# EAGLE board main V.1 (EAGLE 9.1.3)
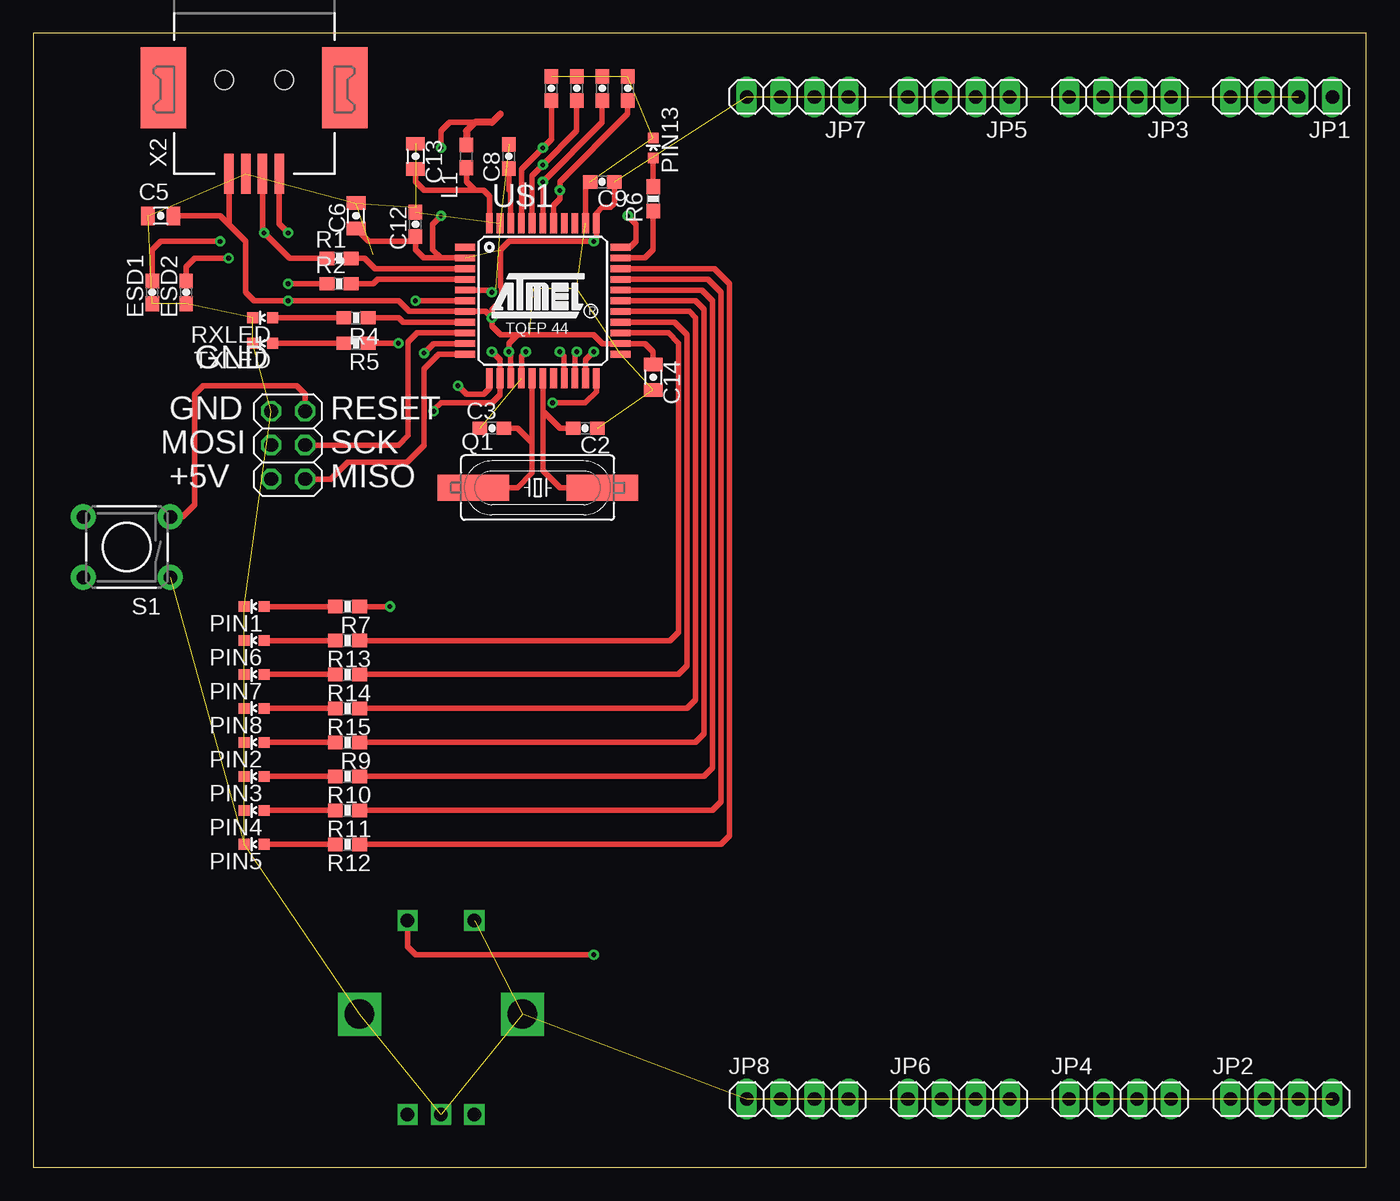
[diagram p0: board, top side]
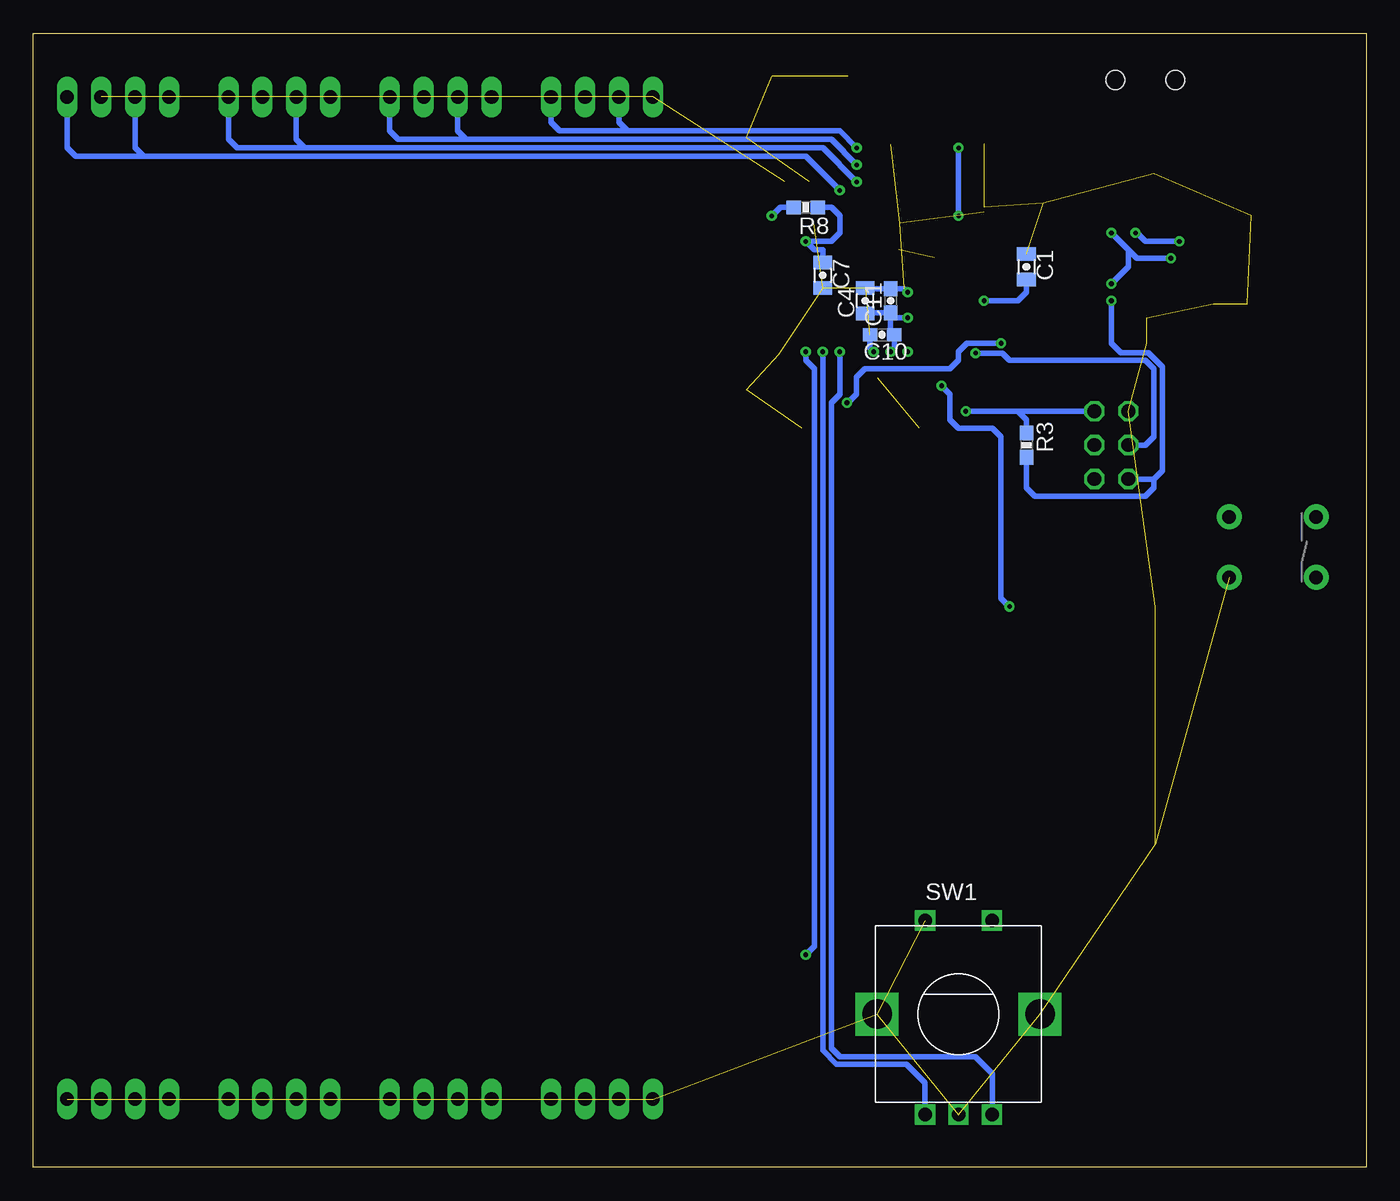
[diagram p1: board, bottom side, seen from below]

Size 99.67 x 84.76 mm. Coordinates in mm from the lower left corner, seen from the top.
Outline: 0,0 99.67,0 99.67,84.76 0,84.76 0,0
Copper layers (1*16): Top 0.035mm / dielectric 1.5mm / Bottom 0.035mm
Design rules "default": minimum track width 6mil, minimum drill 0.35mm, track to track 6mil, track to pad 6mil, pad to pad 6mil, via to via 6mil, smd to smd 6mil, copper to edge 40mil, drill to drill 6mil, minimum pad ring 10mil, minimum via ring 8mil, stop-mask expansion 4mil, vias tented up to drill 0mil, thermal gap 10mil

## Footprints (pad centres in the part's own frame; a part is rotated, then mirrored left to right if it is on the bottom)
CAP-0805 = smd 1 x 1.4: 1 -0.95,0; 2 0.95,0
CAP-0603 = smd 1.1 x 1: 1 -0.9,0; 2 0.9,0
FB-0603 = smd 1.1 x 1: 1 -0.85,0; 2 0.85,0
1X04 = drill 1.016 long: 1 -3.81,0; 2 -1.27,0; 3 1.27,0; 4 3.81,0
2X03 = drill 1.016 octagon: 1 -2.54,-1.27; 2 -2.54,1.27; 3 0,-1.27; 4 0,1.27; 5 2.54,-1.27; 6 2.54,1.27
IND-0603 = smd 1.1 x 1: 1 -0.85,0; 2 0.85,0
LED-0603 = smd 0.8 x 0.8: A 0,-0.75; C 0,0.75
HC49UP = smd 5.334 x 1.93: 1 -4.826,0; 2 4.826,0
RES-0603 = smd 1.1 x 1: 1 -0.9,0; 2 0.9,0
SW-SPST-TH06X06 = drill 1.016 pad 1.88: A@1 -3.251,-2.261; A@2 3.251,-2.261; B@1 -3.251,2.261; B@2 3.251,2.261
ALPS_EC12E_SW = drill 1 square: A -2.5,-7.5; B 2.5,-7.5; C 0,-7.5; D -2.5,7; E 2.5,7 | drill 2.2 square: GND1 -6.1,0; GND2 6.1,0
TQFP44 = smd 1.5 x 0.5: 1 -5.8,4; 2 -5.8,3.2; 3 -5.8,2.4; 4 -5.8,1.6; 5 -5.8,0.8; 6 -5.8,0; 7 -5.8,-0.8; 8 -5.8,-1.6; 9 -5.8,-2.4; 10 -5.8,-3.2; 11 -5.8,-4; 23 5.8,-4; 24 5.8,-3.2; 25 5.8,-2.4; 26 5.8,-1.6; 27 5.8,-0.8; 28 5.8,0; 29 5.8,0.8; 30 5.8,1.6; 31 5.8,2.4; 32 5.8,3.2; 33 5.8,4 | smd 0.5 x 1.5: 12 -4,-5.8; 13 -3.2,-5.8; 14 -2.4,-5.8; 15 -1.6,-5.8; 16 -0.8,-5.8; 17 0,-5.8; 18 0.8,-5.8; 19 1.6,-5.8; 20 2.4,-5.8; 21 3.2,-5.8; 22 4,-5.8; 34 4,5.8; 35 3.2,5.8; 36 2.4,5.8; 37 1.6,5.8; 38 0.8,5.8; 39 0,5.8; 40 -0.8,5.8; 41 -1.6,5.8; 42 -2.4,5.8; 43 -3.2,5.8; 44 -4,5.8
USB-B-SMT = smd 6.04 x 3.4: 5 0.58,6.8; 6 0.58,-6.8 | smd 3 x 0.7: D+ 7,1.875; D- 7,0.625; GND 7,-0.625; VUSB 7,-1.875 | hole 1.4: 0,2.25; 0,-2.25

## Placement (x,y rotation side)
C1  1uF  [CAP-0805]  25.4,67.31 270 bottom
C2  22pF  [CAP-0603]  41.27,55.24 180 top
C3  22pF  [CAP-0603]  34.29,55.24 0 top
C4  1uF  [CAP-0805]  37.47,64.77 90 bottom
C5  [CAP-0805]  9.53,71.12 180 top
C6  [CAP-0805]  24.13,71.12 90 top
C7  [CAP-0805]  40.64,66.68 270 bottom
C8  470nF  [CAP-0603]  35.56,75.57 90 top
C9  470pF  [CAP-0603]  42.55,73.66 180 top
C10  470pF  [CAP-0603]  36.2,62.23 180 bottom
C11  470pF  [CAP-0603]  35.56,64.77 90 bottom
C12  470pF  [CAP-0603]  28.57,70.48 90 top
C13  [CAP-0805]  28.57,75.57 270 top
C14  1uF  [CAP-0805]  46.35,59.05 270 top
C15  [CAP-0603]  38.73,80.65 90 top
C16  [CAP-0603]  40.64,80.65 90 top
C17  [CAP-0603]  42.55,80.65 90 top
C18  [CAP-0603]  44.45,80.65 90 top
ESD1  [FB-0603]  8.89,65.41 90 top
ESD2  [FB-0603]  11.43,65.41 90 top
JP1  [1X04]  93.34,80.01 180 top
JP2  [1X04]  93.34,5.08 0 top
JP3  [1X04]  81.28,80.01 180 top
JP4  [1X04]  81.28,5.08 0 top
JP5  [1X04]  69.22,80.01 180 top
JP6  [1X04]  69.22,5.08 0 top
JP7  [1X04]  57.15,80.01 180 top
JP8  [1X04]  57.15,5.08 0 top
JP9  [2X03]  19.05,53.98 90 top
L1  [IND-0603]  32.38,75.57 90 top
PIN1  [LED-0603]  16.51,41.91 90 top
PIN2  [LED-0603]  16.51,31.75 90 top
PIN3  [LED-0603]  16.51,29.21 90 top
PIN4  [LED-0603]  16.51,26.67 90 top
PIN5  [LED-0603]  16.51,24.13 90 top
PIN6  [LED-0603]  16.51,39.37 90 top
PIN7  [LED-0603]  16.51,36.83 90 top
PIN8  [LED-0603]  16.51,34.29 90 top
PIN13  [LED-0603]  46.35,76.2 0 top
Q1  [HC49UP]  37.72,50.8 0 top
R1  [RES-0603]  22.86,67.95 0 top
R2  [RES-0603]  22.86,66.04 0 top
R3  22k  [RES-0603]  25.4,53.98 270 bottom
R4  [RES-0603]  24.13,63.5 180 top
R5  [RES-0603]  24.13,61.59 180 top
R6  [RES-0603]  46.35,72.39 90 top
R7  [RES-0603]  23.5,41.91 180 top
R8  22k  [RES-0603]  41.91,71.76 180 bottom
R9  [RES-0603]  23.5,31.75 180 top
R10  [RES-0603]  23.5,29.21 180 top
R11  [RES-0603]  23.5,26.67 180 top
R12  [RES-0603]  23.5,24.13 180 top
R13  [RES-0603]  23.5,39.37 180 top
R14  [RES-0603]  23.5,36.83 180 top
R15  [RES-0603]  23.5,34.29 180 top
RXLED  [LED-0603]  17.14,63.5 90 top
S1  SW-SPSTTH06X06  [SW-SPST-TH06X06]  6.99,46.35 180 top
SW1  EC12E_SW  [ALPS_EC12E_SW]  30.48,11.43 0 bottom
TXLED  [LED-0603]  17.14,61.59 90 top
U$1  ATMEGA32U4-AU  [TQFP44]  38.1,64.77 0 top
X2  USB-B-S  [USB-B-SMT]  16.51,81.28 270 top

## Library data of the parts
C1-C18 ESD1 ESD2 L1 R1-R15 = Ai_Passives
JP1-JP9 = pinhead
PIN1-PIN8 PIN13 RXLED TXLED = Ai_LED
Q1 = Ai_FrequencyControl
S1 = Ai_Electromechanical
SW1 = switch-alps; MPN: EC12E2424407; OC_FARNELL: 1520813; OC_NEWARK: 74M1068
U$1 = mega32U4
X2 = usb

## Nets
+5V: C4.1 C5.1 C6.1 C7.1 C9.1 C10.1 C11.1 C12.1 C14.1 JP1.2 JP1.4 JP3.2 JP3.4 JP5.2 JP5.4 JP7.2 JP7.4 JP9.2 L1.2 R3.2 R8.1 U$1.2 U$1.7 U$1.14 U$1.24 U$1.34 X2.VUSB
FADER1: C18.1 JP1.1 JP1.3 U$1.38
FADER2: C17.1 JP3.1 JP3.3 U$1.39
FADER3: C16.1 JP5.1 JP5.3 U$1.40
FADER4: C15.1 JP7.1 JP7.3 U$1.41
GND: C1.1 C2.1 C3.1 C4.2 C5.2 C6.2 C7.2 C8.2 C9.2 C10.2 C11.2 C12.2 C13.1 C14.2 C15.2 C16.2 C17.2 C18.2 ESD1.1 ESD2.1 JP2.1 JP2.2 JP2.3 JP2.4 JP4.1 JP4.2 JP4.3 JP4.4 JP6.1 JP6.2 JP6.3 JP6.4 JP8.1 JP8.2 JP8.3 JP8.4 JP9.6 PIN1.C PIN2.C PIN3.C PIN4.C PIN5.C PIN6.C PIN7.C PIN8.C PIN13.C RXLED.C S1.B@1 SW1.C SW1.D SW1.GND1 SW1.GND2 TXLED.C U$1.5 U$1.15 U$1.23 U$1.35 U$1.43 X2.GND
MISO: JP9.1 U$1.11
MOSI: JP9.4 U$1.10
N$1: ESD1.2 R1.1 X2.D-
N$2: ESD2.2 R2.1 X2.D+
N$3: R1.2 U$1.3
N$4: R2.2 U$1.4
N$5: R8.2 U$1.33
N$6: C1.2 U$1.6
N$7: C2.2 Q1.2 U$1.17
N$8: C3.2 Q1.1 U$1.16
N$9: R7.1 U$1.12
N$10: R4.1 U$1.8
N$11: R4.2 RXLED.A
N$12: R5.1 U$1.22
N$13: R5.2 TXLED.A
N$14: R6.1 U$1.32
N$15: PIN13.A R6.2
N$16: C8.1 U$1.42
N$17: PIN1.A R7.2
N$18: PIN2.A R9.2
N$19: SW1.E U$1.21
N$20: SW1.A U$1.20
N$21: SW1.B U$1.19
N$22: PIN5.A R12.2
N$23: PIN4.A R11.2
N$24: PIN3.A R10.2
N$25: C13.2 L1.1 U$1.44
N$26: R9.1 U$1.28
N$27: R10.1 U$1.29
N$28: R11.1 U$1.30
N$29: R12.1 U$1.31
N$30: R13.1 U$1.25
N$31: R14.1 U$1.26
N$32: R15.1 U$1.27
N$33: PIN6.A R13.2
N$34: PIN7.A R14.2
N$35: PIN8.A R15.2
RESET: JP9.5 R3.1 S1.A@1 U$1.13
SCK: JP9.3 U$1.9

## Tracks (layer width: path | path; a pad name or v marks a point on that pad's centre or on a via)
+5V  (via drill 0.35)  (9 unrouted)
  Top 0.406: U$1.2 30.48,67.97 | 30.48,67.97 29.18,67.97 28.57,68.58 28.57,69.22 | 28.57,69.22 C12.1 | 43.45,72.76 43.45,73.03 | 43.45,73.03 C9.1 | 43.45,73.03 43.45,72.02 43.18,71.76 42.55,71.76 42.1,71.31 U$1.34 42.1,69.41 v41.91,69.22 40.64,69.22 | U$1.14 35.7,60.82 v35.56,60.96 35.56,61.59 36.2,62.23 | 40.64,69.22 41.27,69.22 | C6.1 25.09,69.22 28.57,69.22 | 36.2,62.23 41.91,62.23 42.57,61.57 U$1.24 45.74,61.57 46.35,60.96 C14.1 | v34.29,63.5 33.82,63.97 U$1.7 28.11,63.97 27.3,64.77 v19.05,64.77 16.51,64.77 15.88,65.41 15.88,69.22 15.24,69.85 14.63,70.45 | v34.29,63.5 34.29,64.14 35.02,64.87 35.02,65.71 34.92,65.81 34.92,68.58 35.56,69.22 40.64,69.22 | v34.29,63.5 34.29,62.87 34.92,62.23 36.2,62.23 | X2.VUSB 14.63,70.45 | C5.1 13.97,71.12 14.63,70.45 | 30.48,67.97 29.87,68.58 29.84,68.58 29.84,70.48 v30.48,71.12 | v30.48,76.2 30.48,77.47 31.11,78.11 33.02,78.11
  Top 0.508: 34.92,78.74 34.29,78.11 33.02,78.11 32.38,77.47 L1.2
  Bottom 0.406: v35.56,60.96 35.3,61.23 C10.1 35.56,62.49 35.56,63.5 | 35.56,63.5 C11.1 37.41,63.87 C4.1 | C7.1 40.64,68.58 41.27,68.58 v41.91,69.22 40.01,69.22 39.37,69.85 39.37,71.12 40.01,71.76 R8.1 | v19.05,64.77 19.05,61.59 18.34,60.88 16.28,60.88 15.24,59.84 15.24,52.07 15.88,51.43 | 15.88,51.43 JP9.2 | 15.88,51.43 15.88,50.8 16.51,50.16 24.77,50.16 25.4,50.8 R3.2 | v34.29,63.5 35.56,63.5 | v30.48,71.12 v30.48,76.2
FADER1  (via drill 0.35)
  Top 0.406: U$1.38 38.9,71.92 39.37,72.39 v39.37,73.03 39.37,73.66 44.45,78.74 C18.1
  Bottom 0.406: v39.37,73.03 41.91,75.57 91.44,75.57 | 91.44,75.57 92.08,76.2 JP1.3 | 91.44,75.57 96.52,75.57 97.16,76.2 JP1.1
FADER2  (via drill 0.35)
  Top 0.406: U$1.39 v38.1,73.66 42.55,78.11 C17.1
  Bottom 0.406: v38.1,73.66 40.64,76.2 79.38,76.2 | 79.38,76.2 80.01,76.84 JP3.3 | 79.38,76.2 84.45,76.2 85.09,76.84 JP3.1
FADER3  (via drill 0.35)
  Top 0.406: U$1.40 37.3,74.13 v38.1,74.93 40.64,77.47 C16.1
  Bottom 0.406: v38.1,74.93 40.01,76.84 67.31,76.84 | 67.31,76.84 72.39,76.84 73.03,77.47 JP5.1 | JP5.3 67.94,77.47 67.31,76.84
FADER4  (via drill 0.35)
  Top 0.406: U$1.41 36.5,74.6 v38.1,76.2 38.73,76.84 C15.1
  Bottom 0.406: v38.1,76.2 39.37,77.47 55.24,77.47 | 55.24,77.47 60.33,77.47 60.96,78.11 JP7.1 | JP7.3 55.88,78.11 55.24,77.47
GND  (via drill 0.35)  (54 unrouted)
  Top 0.406: U$1.35 41.3,73.32 C9.2 | U$1.5 34.12,65.57 v34.29,65.41 | U$1.15 36.5,60.63 v36.83,60.96 | C12.2 28.57,71.76
  Bottom 0.406: v34.29,65.41 34.55,65.67 C11.2 37.41,65.67 C4.2 | v36.83,60.96 37.09,61.23 C10.2
MISO
  Top 0.406: JP9.1 22.23,51.43 23.5,52.7 27.94,52.7 29.21,53.98 29.21,59.69 30.29,60.77 U$1.11
MOSI  (via drill 0.35)
  Top 0.406: U$1.10 29.92,61.57 v29.21,60.86
  Bottom 0.406: v29.21,60.86 27.21,60.86 26.67,60.32 16.51,60.32 15.88,59.69 15.88,54.61 16.51,53.98 JP9.4
N$1  (via drill 0.35)
  Top 0.406: R1.1 19.68,67.95 19.15,67.95 v17.24,69.85 17.14,69.96 X2.D- | ESD1.2 8.89,68.58 9.53,69.22 v13.97,69.22
  Bottom 0.406: v13.97,69.22 16.51,69.22 17.14,69.85 v17.24,69.85
N$2  (via drill 0.35)
  Top 0.406: R2.1 v19.05,66.04 | ESD2.2 11.43,67.31 12.06,67.95 v14.61,67.95 | X2.D+ 18.39,70.52 v19.05,69.85
  Bottom 0.406: v19.05,66.04 17.78,67.31 17.78,68.58 | v14.61,67.95 17.14,67.95 17.78,68.58 | v19.05,69.85 17.78,68.58
N$3
  Top 0.406: R1.2 24.77,67.95 25.54,67.17 U$1.3
N$4
  Top 0.406: R2.2 25.4,66.04 25.73,66.37 U$1.4
N$5  (via drill 0.35)
  Top 0.406: v44.45,71.12 45.09,70.48 45.09,69.22 44.64,68.77 U$1.33
  Bottom 0.406: R8.2 43.81,71.76 v44.45,71.12
N$6  (via drill 0.35)
  Top 0.406: U$1.6 v28.57,64.77
  Bottom 0.406: v28.57,64.77 26.04,64.77 25.4,65.41 C1.2
N$7
  Top 0.406: Q1.2 39.37,50.8 38.1,52.07 38.1,56.51 | U$1.17 38.1,56.51 | C2.2 39.37,55.24 38.1,56.51
N$8
  Top 0.406: 33.66,50.8 34.29,50.8 33.66,50.8 | 33.66,50.8 Q1.1 36.2,50.8 37.3,51.9 37.3,53.98 | U$1.16 37.3,53.98 | C3.2 36.2,55.24 37.3,54.14 37.3,53.98
N$9  (via drill 0.35)
  Top 0.406: U$1.12 34.1,58.23 33.66,57.79 32.38,57.79 v31.75,58.42 | v26.67,41.91 R7.1
  Bottom 0.406: v31.75,58.42 31.11,57.79 31.11,55.88 30.48,55.24 27.94,55.24 27.3,54.61 27.3,42.54 v26.67,41.91
N$10
  Top 0.406: U$1.8 27.64,63.17 27.3,63.5 R4.1
N$11
  Top 0.406: RXLED.A R4.2
N$12  (via drill 0.35)
  Top 0.406: U$1.22 42.1,57.98 41.27,57.15 v38.83,57.15 | v27.3,61.59 R5.1
  Bottom 0.406: v38.83,57.15 38.73,57.15 38.1,57.79 38.1,59.05 37.47,59.69 31.11,59.69 30.48,60.32 30.48,60.96 29.84,61.59 v27.3,61.59
N$13
  Top 0.406: R5.2 TXLED.A
N$14
  Top 0.406: U$1.32 45.74,67.97 46.35,68.58 R6.1
N$15
  Top 0.406: R6.2 PIN13.A
N$16
  Top 0.406: U$1.42 35.7,72.89 35.56,73.03 C8.1
N$17
  Top 0.406: R7.2 PIN1.A
N$18
  Top 0.406: R9.2 PIN2.A
N$19  (via drill 0.35)
  Top 0.406: U$1.21 41.3,60.35 v41.91,60.96 | SW1.E 27.98,16.47 28.57,15.87 v41.91,15.87
  Bottom 0.406: v41.91,60.96 41.91,60.32 | 41.91,60.32 | 41.91,60.32 41.27,59.69 41.27,58.42 | 41.27,58.42 | 41.27,58.42 41.27,16.51 v41.91,15.87
N$20  (via drill 0.35)
  Top 0.406: U$1.20 40.5,60.82 v40.64,60.96
  Bottom 0.406: v40.64,60.96 40.64,8.74 39.6,7.7 34.37,7.7 32.98,6.31 SW1.A
N$21  (via drill 0.35)
  Top 0.406: U$1.19 39.7,60.63 v39.37,60.96
  Bottom 0.406: v39.37,60.96 39.37,57.79 40.01,57.15 40.01,8.89 39.37,8.26 29.21,8.26 27.94,6.99 27.94,3.97 SW1.B
N$22
  Top 0.406: R12.2 PIN5.A
N$23
  Top 0.406: R11.2 PIN4.A
N$24
  Top 0.406: R10.2 PIN3.A
N$25
  Top 0.406: U$1.44 34.1,72.58 33.66,73.03 33.02,73.03 | 33.02,73.03 32.38,73.66 L1.1 | C13.2 28.57,73.66 29.21,73.03 33.02,73.03
N$26
  Top 0.406: R9.1 49.53,31.75 50.16,32.38 50.16,64.14 49.53,64.77 U$1.28
N$27
  Top 0.406: U$1.29 50,65.57 50.8,64.77 50.8,29.84 50.16,29.21 R10.1
N$28
  Top 0.406: U$1.30 50.47,66.37 51.44,65.41 51.44,27.3 50.8,26.67 R11.1
N$29
  Top 0.406: U$1.31 50.94,67.17 52.07,66.04 52.07,24.77 51.44,24.13 R12.1
N$30
  Top 0.406: R13.1 47.62,39.37 48.26,40 48.26,61.59 47.48,62.37 U$1.25
N$31
  Top 0.406: U$1.26 47.95,63.17 48.9,62.23 48.9,37.46 48.26,36.83 R14.1
N$32
  Top 0.406: U$1.27 49.06,63.97 49.53,63.5 49.53,34.92 48.9,34.29 R15.1
N$33
  Top 0.406: R13.2 PIN6.A
N$34
  Top 0.406: R14.2 PIN7.A
N$35
  Top 0.406: R15.2 PIN8.A
RESET  (via drill 0.35)
  Top 0.406: v34.29,60.96 34.9,60.35 U$1.13 34.9,57.76 34.29,57.15 30.48,57.15 29.94,56.61 v29.94,56.51 | S1.A@1 11.15,48.62 12.06,49.53 12.06,57.79 12.7,58.42 19.68,58.42 20.32,57.79 JP9.5
  Bottom 0.406: v29.94,56.51 26.04,56.51 | 26.04,56.51 JP9.5 | R3.1 25.4,55.88 26.04,56.51
SCK
  Top 0.406: U$1.9 28.71,62.37 28.04,61.69 28.04,54.71 27.3,53.98 JP9.3

## Text on the board
tNames: GND | GND | RESET | MOSI | SCK | +5V | MISO